# Altium PCB sound.PcbDoc
Units mm, origin at the board's own origin, x right, y up, seen from the top; angles counter-clockwise.
Board outline 152.4 x 101.6 mm, 2 copper layers (Top Layer, Bottom Layer); 20 components, 9 nets, 48 pads, 10 vias.
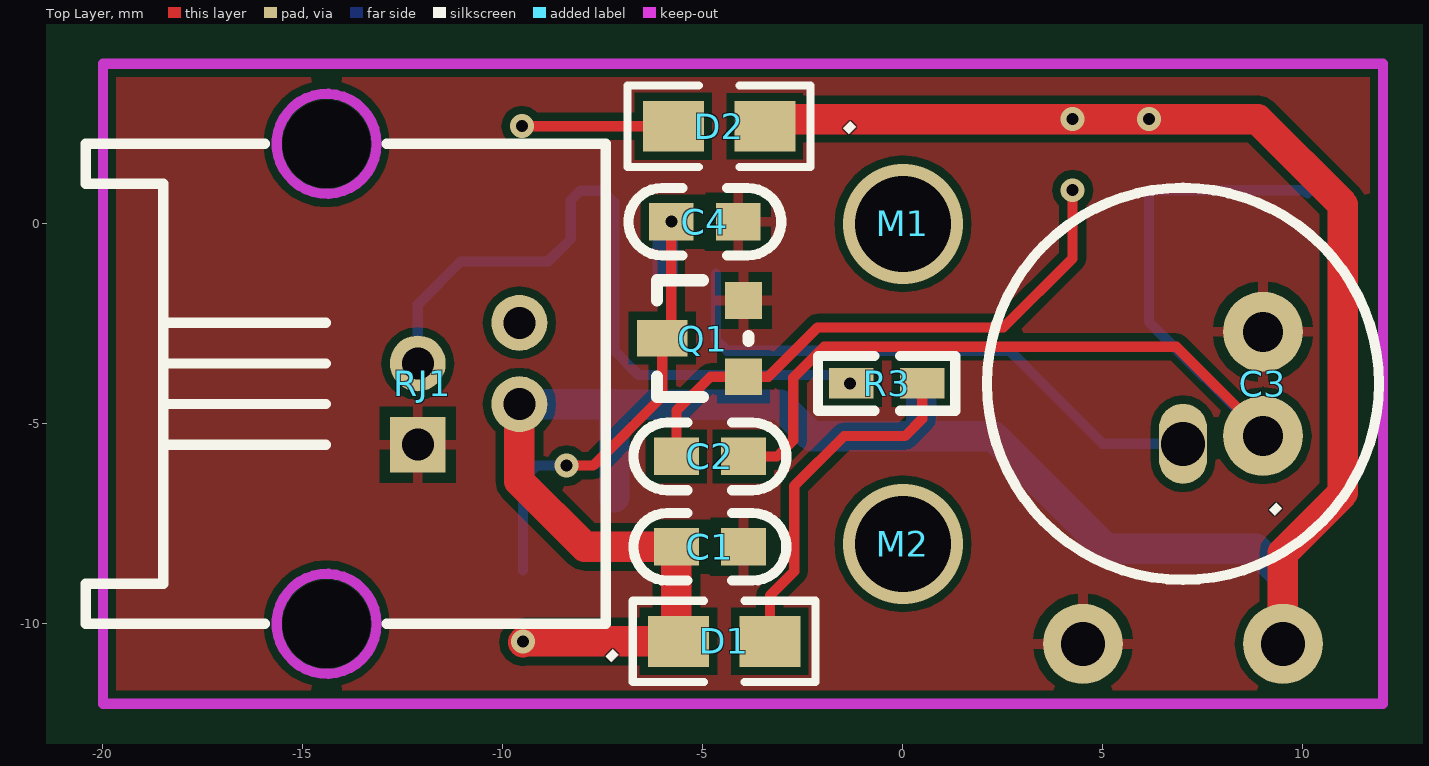
[diagram p0: Top Layer view]
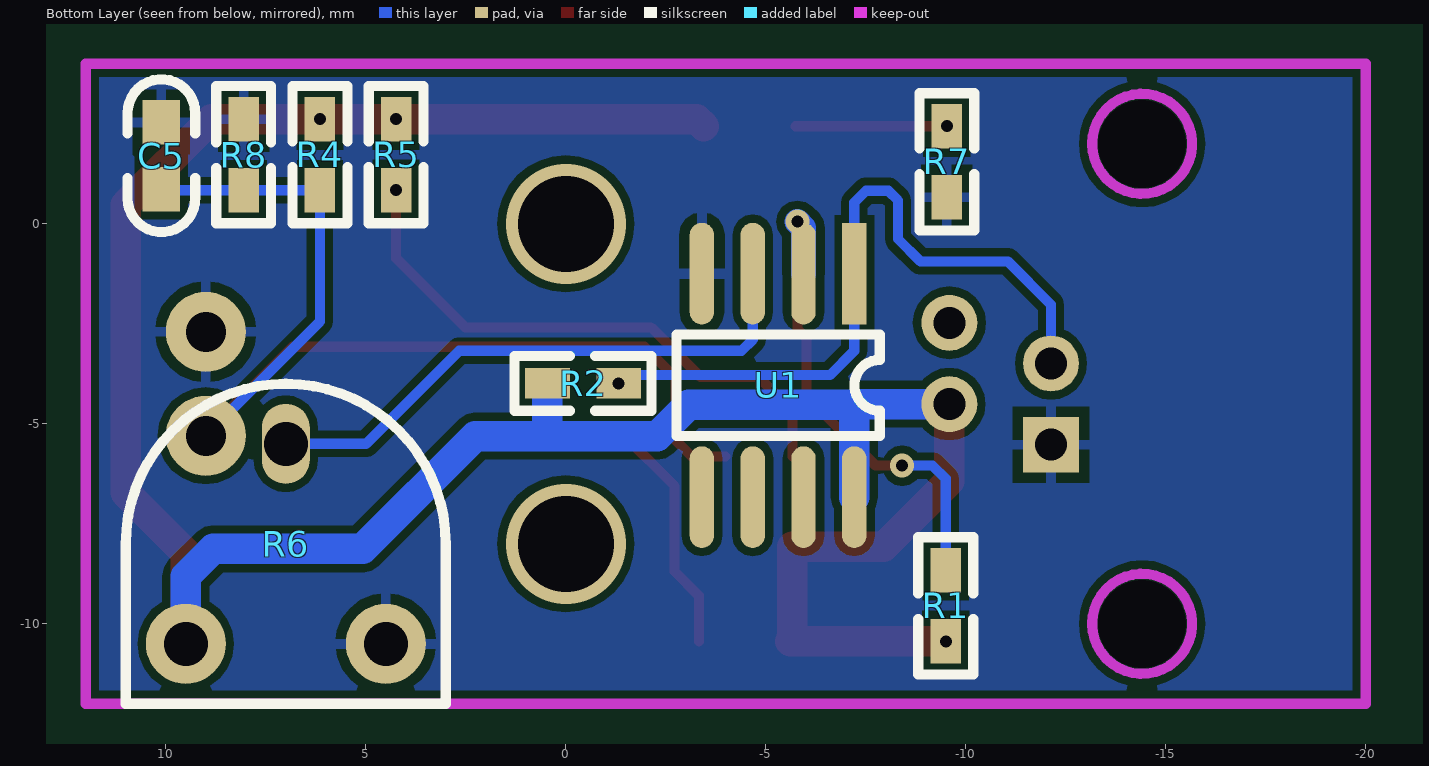
[diagram p1: Bottom Layer view, seen from below]
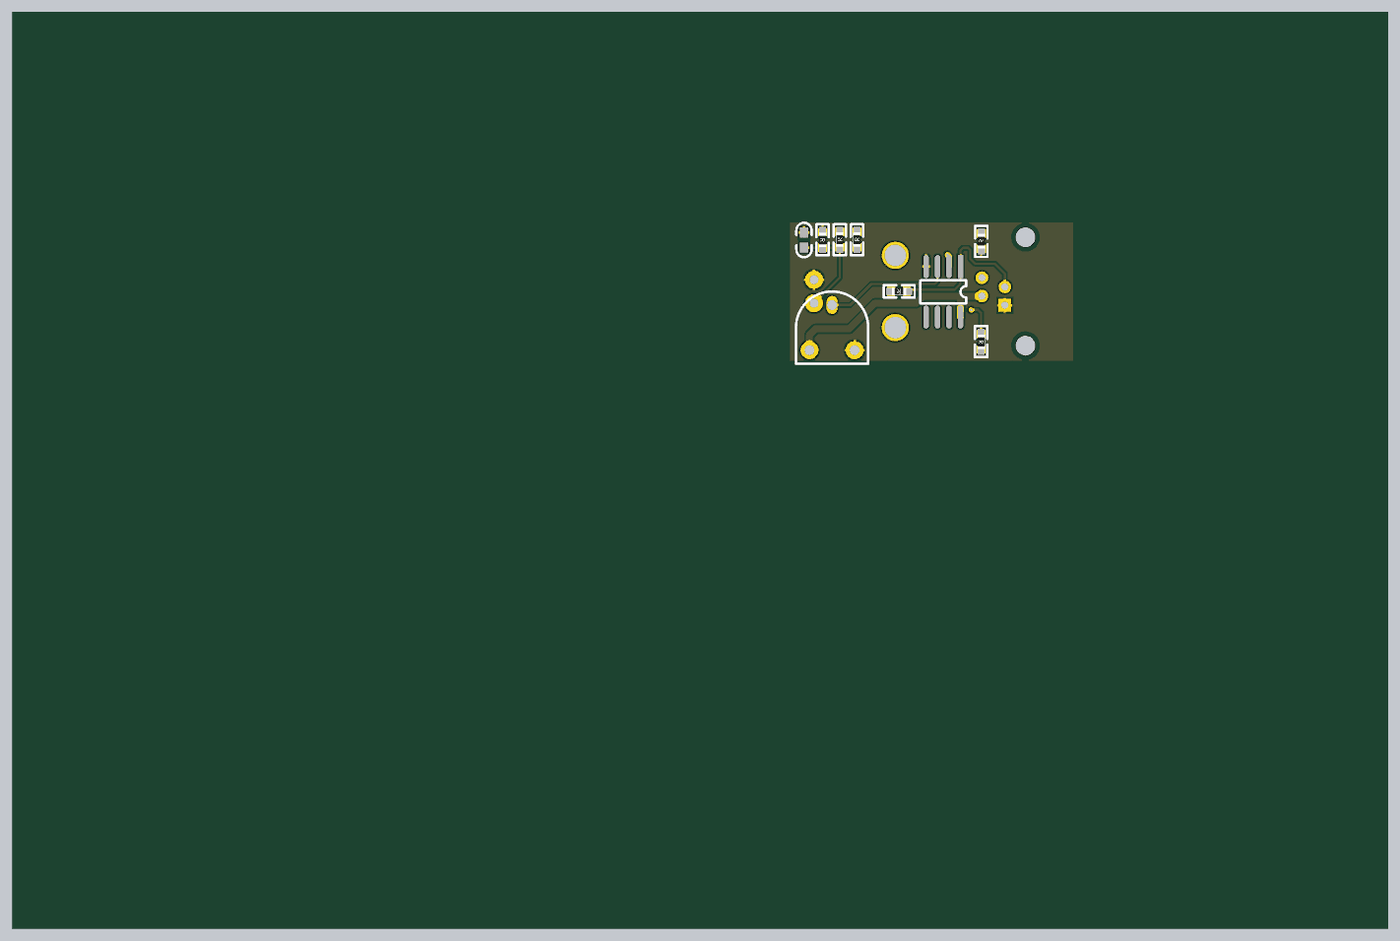
[diagram p2: 3D render of the assembled board from below, using the file's embedded part models]

## Layer stack, top to bottom
Top Solder: solder mask 0.0102, Solder Resist, Dk 3.5
Top Layer: signal copper 0.0356
Dielectric 1: dielectric 0.32, FR-4, Dk 4.8
Bottom Layer: signal copper 0.0356
Bottom Solder: solder mask 0.0102, Solder Resist, Dk 3.5

## Board outline
-54.6,-74.6 97.8,-74.6 97.8,27 -54.6,27

## Design rules (kind name [scope] priority, off if disabled: settings)
Clearance [All] p1: gap=0.203
ComponentClearance [All] p1 off: gap=0.254 collisioncheckmode=3 verticalgap=0.254 showdistances=FALSE
PolygonConnect [All] p1: connectstyle=Relief reliefconductorwidth=0.254 reliefentries=4 polygonreliefangle="90 Angle" airgapwidth=0.254
RoutingVias [All] p1: holewidth=0.711 width=1.27 viastyle="Through Hole" minholewidth=0.711 minwidth=1.27 maxholewidth=0.711 maxwidth=1.27
SolderMaskExpansion [All] p1: expansion=0.102
Width [All] p1: maxlimit=5.54 minlimit=0.254 preferedwidth=0.254
28 further rules are at their usual default settings.

## Components (designator, comment, footprint, x,y, rotation, side; value= is the part's Value field where it differs from the comment)
C1 "Cap" 0603_C -4.826,-8.077 r90 top
C2 "Cap" 0603_C -4.826,-5.817 r270 top
C3 "microphone" MICROPHONE 9,-4 r270 top
C4 "Cap" 0603_C -4.953,0.051 r90 top
C5 "Cap" 0603_C 10.109,1.702 r180 bottom
D1 "LED" 0805 -4.47,-10.439 r270 top
D2 "LED" 0805 -4.597,2.438 r90 top
M1 "M2" M2 0,0 r0 top
M2 "M2" M2 0,-8 r0 top
Q1 "9014" SOT23 -5.004,-2.87 r90 top
R1 "Res2" 0603_R -9.5,-9.55 r180 bottom
R2 "Res2" 0603_R -0.432,-3.988 r270 bottom
R3 "Res2" 0603_R -0.406,-3.988 r90 top
R4 "Res2" 0603_R 6.147,1.727 r0 bottom
R5 "Res2" 0603_R 4.242,1.727 r0 bottom
R6 "RPot" 电位器 7,-8 r0 bottom
R7 "Res2" 0603_R -9.525,1.549 r0 bottom
R8 "Res2" 0603_R 8.052,1.727 r180 bottom
RJ1 "RJ11" RJ11 -12,-4 r90 top
U1 "LM393" SO-8 -5.309,-4.039 r180 bottom

## Footprints (in the part's own frame and the unit in brackets; to place one, negate y for a bottom-side part, rotate by r counter-clockwise, add the part's x,y. Pads: shape width x height; smd on the part's side, far side on the other; paste and mask are expansions set on the pad)
0603_C [mil]
  rect 37x44 smd: 1(0,-33) 2(0,33)
  silkscreen extent -33,-75 33,75
0603_R [mil]
  rect 30x44 smd: 1(0,35) 2(0,-35)
  silkscreen extent -27,-68 27,68, body extent -19,-52 20,50, height 21
0805 [mil]
  rect 50x60 smd: 1(0,-45) 2(0,45)
  silkscreen extent -40,-90 40,90
M2 [mm]
MICROPHONE [mm]
  round 2 hole 1: 1(1.3,0) 2(-1.3,0)
  silkscreen extent -4.9,-6.9 4.9,2.9
RJ11 [mm]
  round 2.1 hole 2.2 unplated: 0(-6,2.41) 0(6,2.41)
  rect 1.397x1.397 hole 0.8: 1(-1.524,0.13)
  round 1.397 hole 0.8: 2(-0.508,-2.41) 3(0.508,0.13) 4(1.524,-2.41)
  Keep-Out Layer circle w0.254: c-6,2.41 r1.25
  Keep-Out Layer circle w0.254: c6,2.41 r1.25
  silkscreen extent -6,-4.57 6,8.43
SO-8 [mil]
  rect 24x100 smd: 1(75,110)
  oval 24x100 smd: 2(25,110) 3(-25,110) 4(-75,110) 5(-75,-110) 6(-25,-110) 7(25,-110) 8(75,-110)
  silkscreen extent -100,-50 100,50
SOT23 [mil]
  rect 36x36 smd: 1(37.5,-40) 2(-37.5,-40)
  rect 36x50 smd: 3(0.5,40)
  silkscreen extent -58,-45 58,45
电位器 [mm]
  round 2 hole 1.1: 1(-2.5,2.5) 2(2.5,2.5)
  oval 1.2x2 hole 1.1: 3(0,-2.5)
  silkscreen extent -4,-4 4,4

## Part data
C1 C2 C4 C5: "Capacitor"
D1 D2: library part LED1, "Typical RED GaAs LED"
M1 M2: library part M3
Q1: library part 2N3904, "NPN General Purpose Amplifier"
R1 R2 R3 R4 R5 R7 R8: "Resistor"
R6: "Potentiometer"

## Via types
v1: diameter 0.6, hole 0.3, Top Layer to Bottom Layer, 8 vias
v2: diameter 3, hole 2.4, Top Layer to Bottom Layer, 2 vias

## Nets (pads, with @x,y where several pads share a name; then routed paths per layer and width w, separated by ;. In a path a pad name is that pad's centre, name@x,y a point inside that pad or via, vN(x,y) a via of type N, cw(c..) or ccw(c..) an arc to the next point about the centre after c; other vN are vias at no path point)
GND: C1.1 C3.2 C4.1 C5.2 Q1.1 R6.1 R7.1 R8.1 RJ1.1 U1.4
NetC2_1: C2.1 Q1.2 R5.1 | length 14.3
  Top Layer w0.254: C2.1 -5.664,-4.674 -4.813,-3.823 Q1.2 -3.365,-3.823 -2.134,-2.591 2.515,-2.591 4.242,-0.864 v1(4.242,0.838)
NetC2_2: C2.2 C3.1 C5.1 R4.1 R8.2 | length 27.3
  Top Layer w0.254: C2.2 -3.15,-5.817 -2.743,-5.41 -2.743,-3.847 -1.97,-3.073 6.833,-3.073 9,-5.241 C3.1
  Bottom Layer w0.254: C3.1 6.147,-2.447 R4.1 R8.2 10.033,0.838 C5.1@10.109,0.762
NetC4_2: C4.2 Q1.3 R1.1 U1.2 | length 12.4
  Top Layer w0.254: v1(-8.407,-6.045) -7.747,-6.045 -6.02,-4.318 Q1.3 -5.791,-2.629 v1(-5.791,0.051)
  Bottom Layer w0.254: R1.1 -9.5,-6.375 -9.169,-6.045 v1(-8.407,-6.045)
  Bottom Layer w0.635: U1.2 -5.944,-0.102 v1(-5.791,0.051)
NetD1_2: D1.2 R3.2 | length 8.9
  Top Layer w0.254: D1.2 -3.327,-9.296 -2.718,-8.687 -2.718,-6.553 -1.473,-5.309 0.051,-5.309 0.483,-4.877 R3.2
NetD2_2: D2.2 R7.2 | length 3.8
  Top Layer w0.254: v1@-9.5,2.438 D2.2
  other v1: -9.525,2.438
NetR6_3: R6.3 U1.3 | length 14.4
  Bottom Layer w0.254: U1.3 -4.674,-2.896 -4.394,-3.175 2.667,-3.175 4.992,-5.5 R6.3
OUT_A: R2.1 R3.1 RJ1.3 U1.1 | length 18.2
  Bottom Layer w0.254: RJ1.3 -12.13,-2.021 -11.049,-0.94 -8.865,-0.94 -8.306,-0.381 -8.306,0.584 -8.064,0.826 -7.506,0.826 -7.214,0.533 U1.1 -7.214,-3.175 -6.604,-3.785 -1.524,-3.785 v1(-1.321,-3.988)
VCC: C1.2 D1.1 D2.1 R1.2 R2.2 R4.2 R5.2 R6.2 RJ1.2 U1.8 | length 66
  Top Layer w0.762: RJ1.2 -9.59,-6.437 -7.95,-8.077 C1.2 -5.664,-10.389 D1.1 -9.474,-10.439 v1@-9.5,-10.465 ; D2.1 -3.277,2.616 8.865,2.616 11,0.481 11,-6.729 9.5,-8.229 R6.2
  Bottom Layer w0.762: RJ1.2 -7.214,-4.508 U1.8 ; -7.214,-4.521 -3.073,-4.521 -2.286,-5.309 0.457,-5.309 ; R2.2 0.457,-5.309 ; R6.2 9.5,-8.814 8.814,-8.128 5.08,-8.128 2.261,-5.309 0.457,-5.309
  other v1: -9.5,-10.439 4.242,2.616 6.147,2.616
pads on no net: RJ1.0 RJ1.4 U1.5 U1.6 U1.7
copper on no net:
  other v2: 0,-8 0,0

## Polygon pours and split planes (outlines as drawn)
GND on Top Layer "Top Layer-No Net" (solid, remove dead copper, pour order 4): -21.285,5.105 -21.209,5.029 13.411,5.029 13.411,-13.665 13.462,-13.716 13.081,-13.335 -21.615,-13.335
GND on Bottom Layer "Top Layer-No Net" (solid, remove dead copper, pour order 6): -20.752,4.699 13.868,4.699 13.945,4.623 13.513,4.191 13.513,-13.589 -20.599,-13.589 -21.158,-13.03

## Keep-outs
Keep-Out Layer:
  lines w0.254: -20,-12 12,-12 12,4 -20,4 -20,-12

## Silkscreen, mask and mechanical layers (free items; w line width, h text height)
Top Overlay:
  text "." at -1.651,2.54 h1.52 r315
  text "." at 9,-7 h1.52 r315
  text "." at -7.595,-10.668 h1.52 r315

## Text inside footprints (layer, text, board x,y; h text height)
RJ1: Mechanical 1 "1" at -14.43,-5.778 h1 r270; Mechanical 1 "2" at -8.842,-4.762 h1 r270; Mechanical 1 "3" at -14.43,-3.746 h1 r270; Mechanical 1 "4" at -8.842,-2.73 h1 r270; Mechanical 1 "1" at -19.002,-6.032 h1 r270; Mechanical 1 "4" at -19.002,-2.476 h1 r270